# Altium PCB DC23.PcbDoc
Units mm, origin at the board's own origin, x right, y up, seen from the top; angles counter-clockwise.
Board outline 76 x 60 mm, 2 copper layers (Top Layer, Bottom Layer); 130 components, 69 nets, 345 pads, 412 vias.
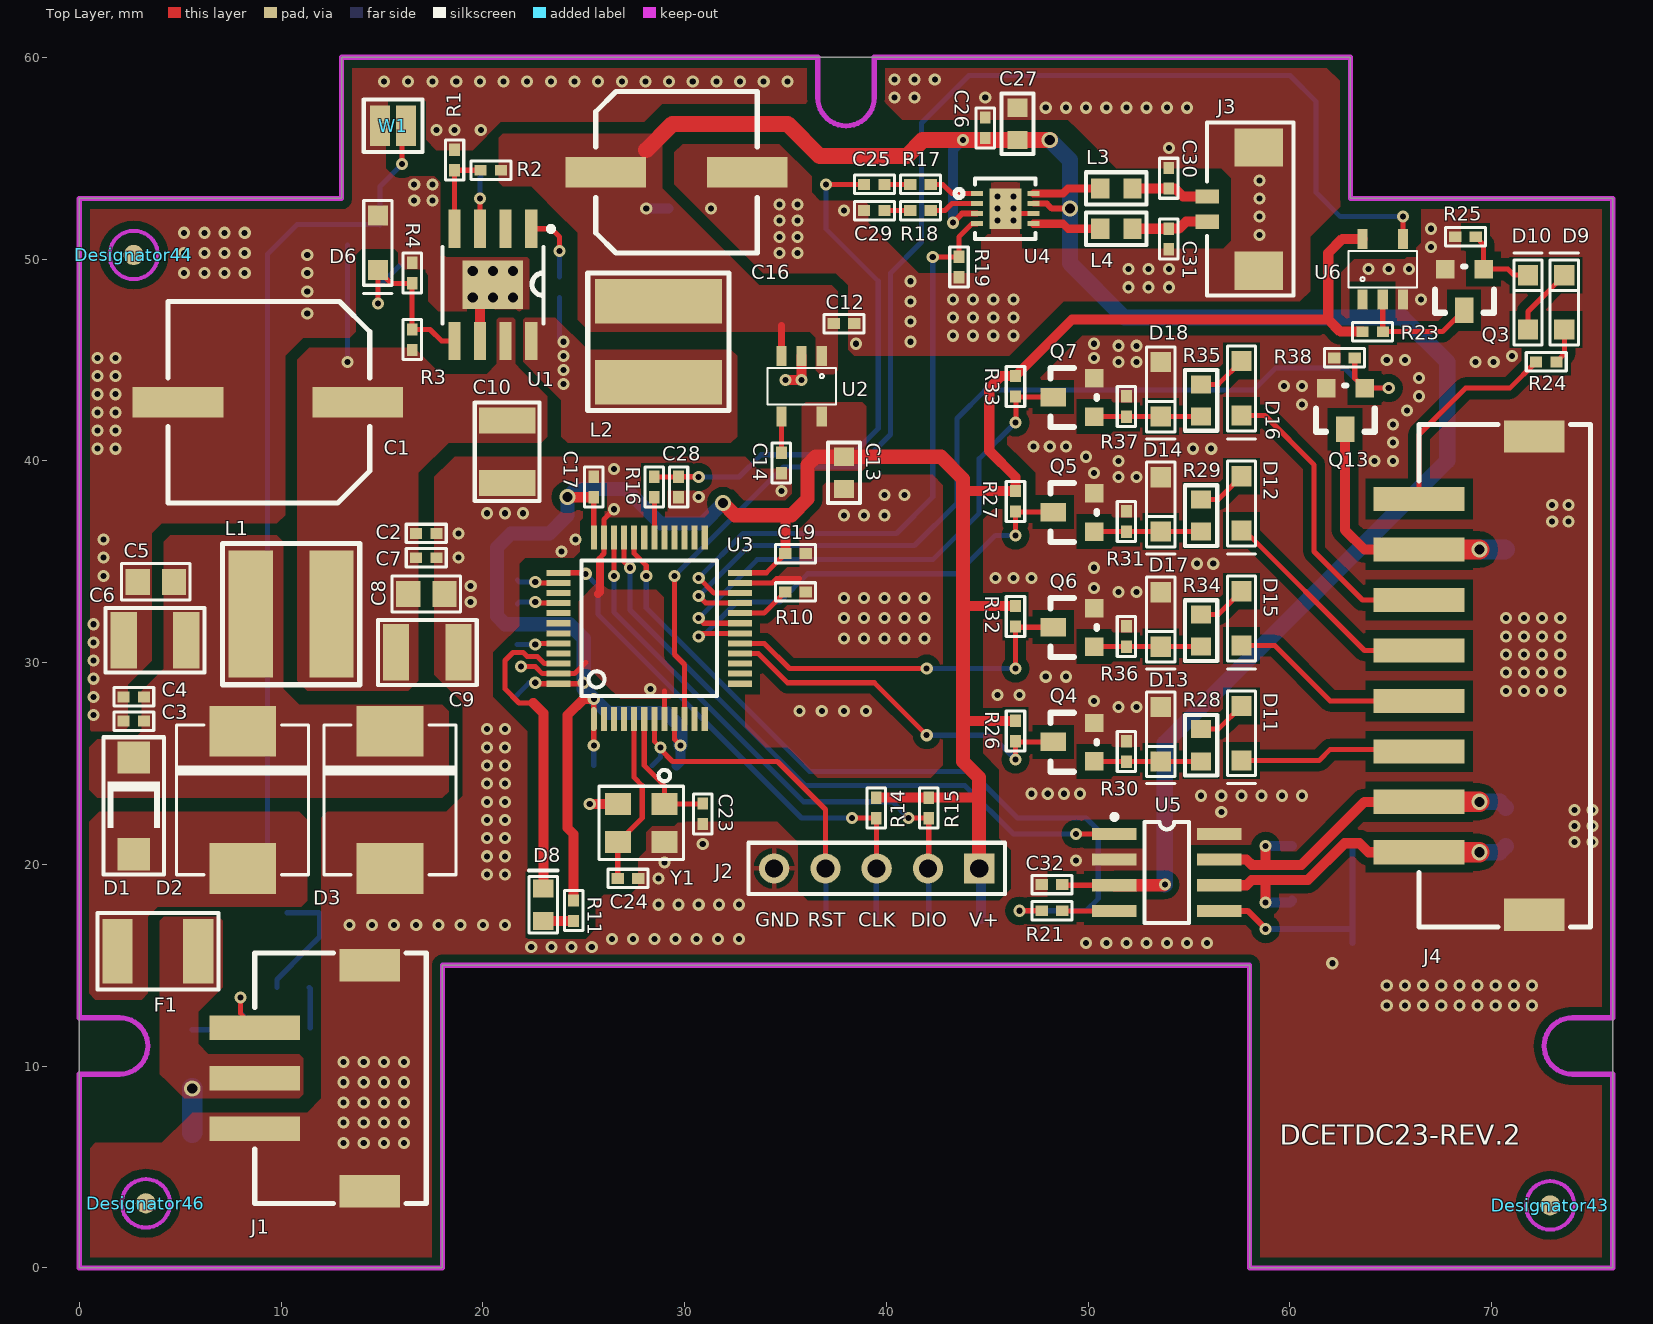
[diagram p0: Top Layer view]
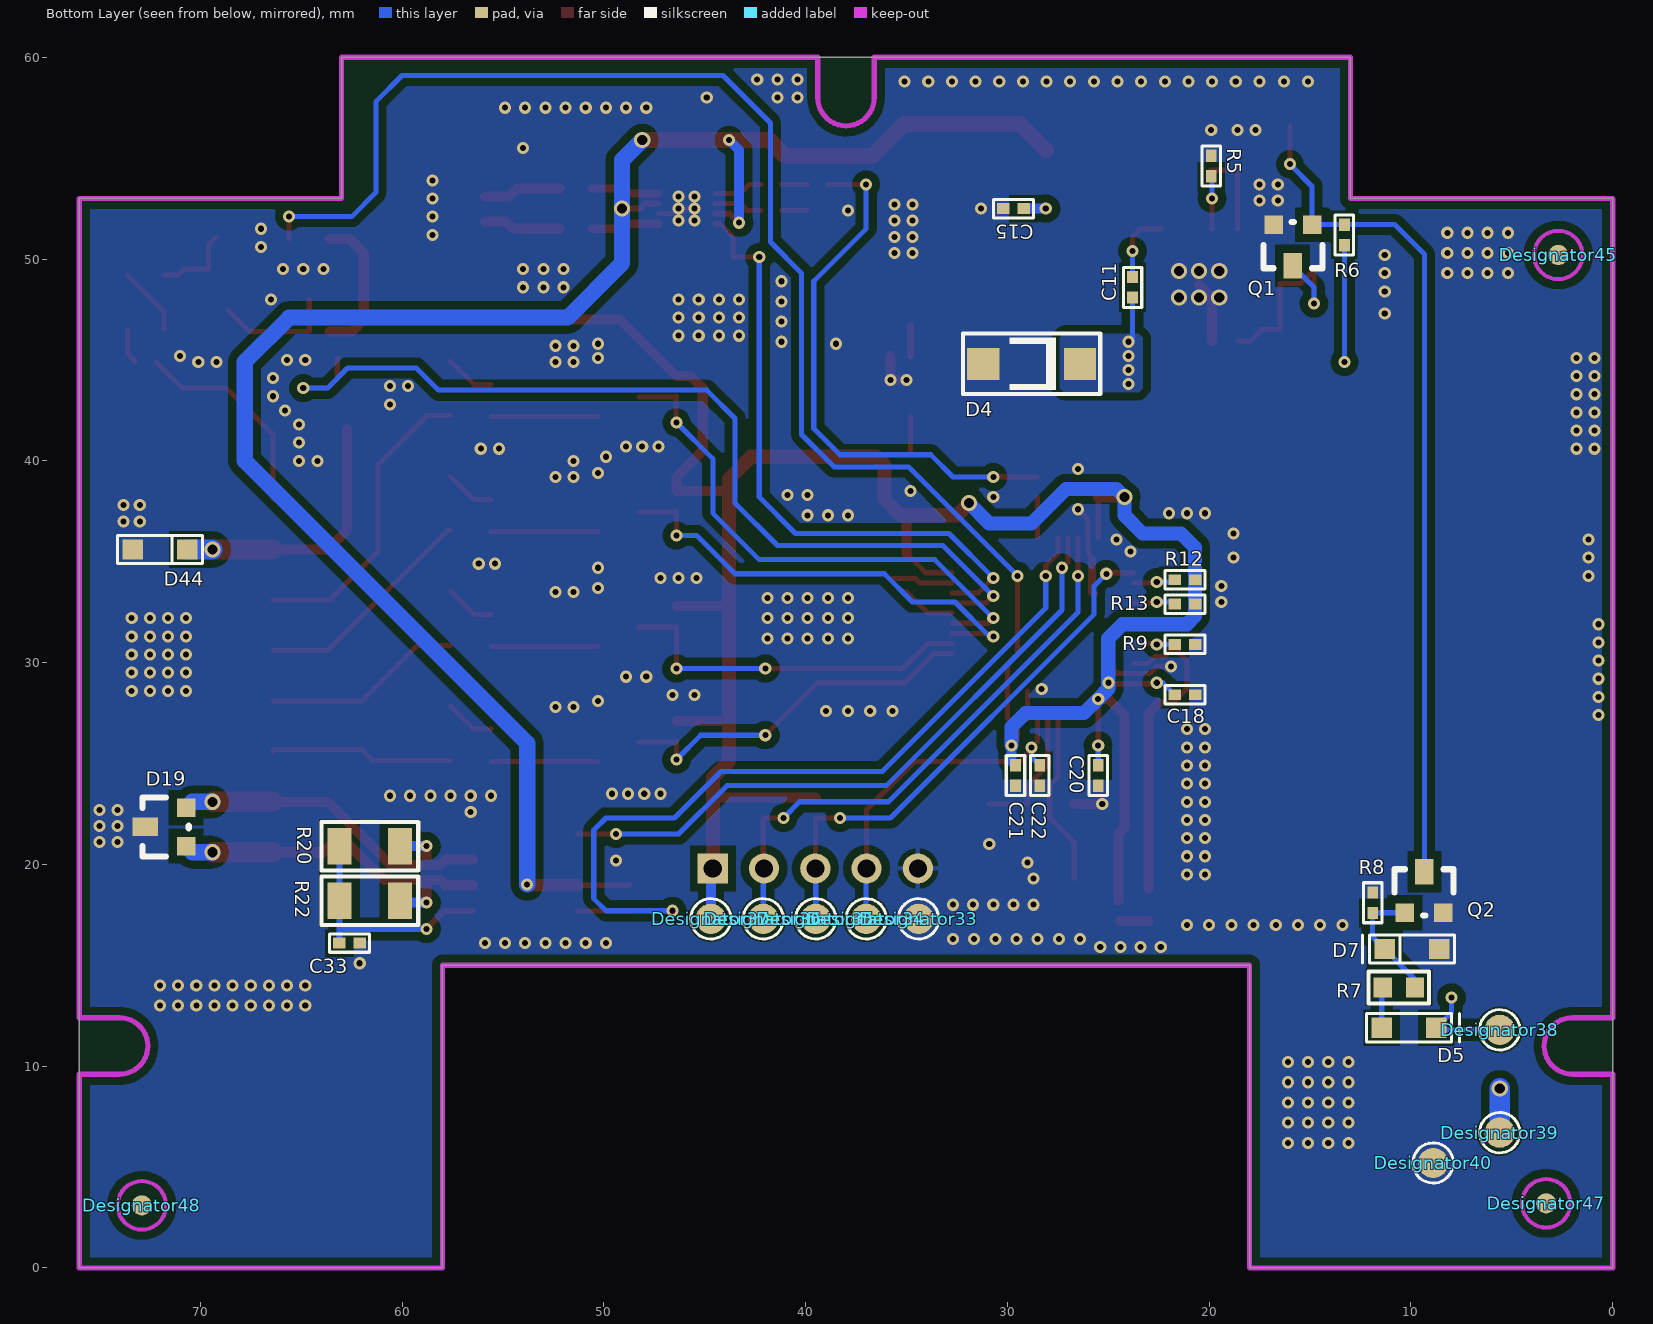
[diagram p1: Bottom Layer view, seen from below]

## Layer stack, top to bottom
Top Solder: solder mask 0.0102, Solder Resist, Dk 3.5
Top Layer: signal copper 0.0356
Dielectric 1: dielectric 0.32, FR-4, Dk 4.8
Bottom Layer: signal copper 0.0356
Bottom Solder: solder mask 0.0102, Solder Resist, Dk 3.5

## Board outline
0,0 0,53 13,53 13,60 63,60 63,53 76,53 76,0 58,0 58,15 18,15 18,0

## Design rules (kind name [scope] priority, off if disabled: settings)
Clearance Clearance_1 [InPolygon AND InNet('GND')] p1: gap=0.4
Clearance [All] p2: gap=0.127
ComponentClearance [All] p1: gap=0 collisioncheckmode=3 verticalgap=0 showdistances=FALSE
DiffPairsRouting [All] p1: maxlimit=0.254 minlimit=0.254 mostfreqgap=0.254 toplayer_minwidth=0.381 toplayer_maxwidth=1 toplayer_prefwidth=0.381 bottomlayer_minwidth=0.381 bottomlayer_maxwidth=1 bottomlayer_prefwidth=0.381 maxuncoupledlength=12.7
PolygonConnect PolygonConnect_1 [InComponent('J2')] p1: connectstyle=Relief reliefconductorwidth=0.254 reliefentries=4 polygonreliefangle="90 Angle" airgapwidth=0.254
PolygonConnect [All] p2: connectstyle=Direct reliefconductorwidth=0.254 reliefentries=4 polygonreliefangle="90 Angle" airgapwidth=0.254
RoutingVias [All] p1: holewidth=0.3 width=0.6 viastyle="Through Hole" minholewidth=0.3 minwidth=0.6 maxholewidth=0.711 maxwidth=1.27
SolderMaskExpansion [All] p1: expansion=0.102
Width [All] p1: maxlimit=4 minlimit=0.127 preferedwidth=0.254 minimp=50.000000 maximp=50.000000 favimp=50.000000
28 further rules are at their usual default settings.

## Classes and differential pairs
component class 4-IO: C32 C33 D9 D10 D11 D12 D13 D14 D15 D16 D17 D18 D19 D44 J4 Q3 Q4 Q5 Q6 Q7 Q13 R20 R21 R22 R23 R24 R25 R26 R27 R28 R29 R30 R31 R32 R33 R34 R35 R36 R37 R38 U5 U6
component class 3-AUDIO-AMP: C25 C26 C27 C28 C29 C30 C31 J3 L3 L4 R16 R17 R18 R19 U4
component class 2-MCU: C17 C18 C19 C20 C21 C22 C23 C24 D8 J2 R9 R10 R11 R12 R13 R14 R15 Y1
component class 1-POWER: C1 C2 C3 C4 C5 C6 C7 C8 C9 C10 C11 C12 C13 C14 C15 C16 D1 D2 D3 D4 D5 D6 D7 F1 J1 L1 L2 Q1 Q2 R1 R2 R3 R4 R5 R6 R7 R8 U1 U2 W1
differential pair CAN: +CAN_P -CAN_N

## Components (designator, comment, footprint, x,y, rotation, side; value= is the part's Value field where it differs from the comment)
C1 "220uF/50V" DL-10*10.5 9.4,42.9 r270 top
C2 "1000pF/50V" 0402 17.2,36.4 r180 top
C3 "1000pF/50V" 0402 2.7,27.1 r0 top
C4 "0.1uF/50V" 0402 2.7,28.3 r0 top
C5 "1uF/50V" 0805 4.7,34 r180 top
C6 "10uF/50V" 1210 5.3,31.1 r180 top
C7 "0.1uF/50V" 0402 17.2,35.2 r180 top
C8 "1uF/50V" 0805 16.3,33.4 r0 top
C9 "10uF/50V" 1210 15.7,30.5 r0 top
C10 "10uF/50V" 1210 21.2,42 r270 top
C11 "0.01uF/50V" 0402 23.8,48.6 r270 bottom
C12 "0.1uF/50V" 0402 37.9,46.8 r0 top
C13 "10uF/6.3V" 0603 37.9,39.4 r180 top
C14 "0.01uF/50V" 0402 34.8,39.9 r270 top
C15 "0.1uF/50V" 0402 29.7,52.5 r0 bottom
C16 "220uF/16V" DL-8*10.5 29.6,54.3 r90 top
C17 "0.1uF/50V" 0402 25.5,38.7 r90 top
C18 "0.1uF/50V" 0402 21.2,28.4 r180 bottom
C19 "0.1uF/50V" 0402 35.5,35.4 r0 top
C20 "0.1uF/50V" 0402 25.5,24.4 r270 bottom
C21 "0.1uF/50V" 0402 29.6,24.4 r270 bottom
C22 "0.1uF" 0402 28.4,24.4 r270 bottom
C23 "20pF/50V" 0402 30.9,22.5 r90 top
C24 "20pF/50V" 0402 27.2,19.3 r180 top
C25 "0.1uF/50V" 0402 39.4,53.7 r0 top
C26 "0.1uF/50V" 0402 44.9,56.5 r90 top
C27 "10uF/6.3V" 0603 46.5,56.7 r0 top
C28 "0.1uF/50V" 0402 29.7,38.7 r90 top
C29 "0.1uF/50V" 0402 39.4,52.4 r0 top
C30 "1000pF/50V" 0402 54,54 r90 top
C31 "1000pF/50V" 0402 54,51 r270 top
C32 "0.1uF/50V" 0402 48.2,19 r0 top
C33 "1000pF(DNP)" 0402 62.6,16.1 r0 bottom
D1 "B360A" B320A 2.7,20.5 r90 top
D2 "SMDJ33CA" SMC 8.1,19.8 r270 top
D3 "SMDJ36A" SMC 15.4,19.8 r270 top
D4 "B360A" B320A 31.2,44.8 r180 bottom
D5 "MM3Z6V2ST1G" SOD323F 10.1,11.9 r0 bottom
D6 "MM3Z5V1ST1G" SOD323F 14.8,50.8 r90 top
D7 "1N5819HW" 1N5819 11.3,15.8 r180 bottom
D8 "LED GREEN" LED0603 23,17.2 r180 top
D9 "1N5819HW" 1N5819 73.6,49.2 r270 top
D10 "1N5819HW" 1N5819 71.8,49.2 r270 top
D11 "MM3Z6V2ST1G" SOD323F 57.6,26.5 r90 top
D12 "MM3Z6V2ST1G" SOD323F 57.6,37.889 r90 top (schematic designator D11)
D13 "1N5819HW" 1N5819 53.6,25.1 r90 top
D14 "1N5819HW" 1N5819 53.6,36.489 r90 top (schematic designator D13)
D15 "MM3Z6V2ST1G" SOD323F 57.6,32.189 r90 top (schematic designator D11)
D16 "MM3Z6V2ST1G" SOD323F 57.6,43.589 r90 top (schematic designator D11)
D17 "1N5819HW" 1N5819 53.6,30.789 r90 top (schematic designator D13)
D18 "1N5819HW" 1N5819 53.6,42.189 r90 top (schematic designator D13)
D19 "PESD1CAN" PESD2CAN 70.7,20.9 r90 bottom
D44 "PESD36VS1UJ" SOD323 72,35.6 r180 bottom
Designator33 "Comment" TP 34.4,17.3 r180 bottom
Designator34 "Comment" TP 37,17.3 r180 bottom
Designator35 "Comment" TP 39.5,17.3 r180 bottom
Designator36 "Comment" TP 42.1,17.3 r180 bottom
Designator37 "Comment" TP 44.7,17.3 r180 bottom
Designator38 "Comment" TP 5.6,11.8 r180 bottom
Designator39 "Comment" TP 5.6,6.7 r180 bottom
Designator40 "Comment" TP 8.9,5.2 r180 bottom
Designator43 "Comment" MARK 72.9,3.1 r0 top locked
Designator44 "Comment" MARK 2.7,50.2 r0 top locked
Designator45 "Comment" MARK 2.7,50.2 r180 bottom locked
Designator46 "Comment" MARK 3.3,3.2 r0 top locked
Designator47 "Comment" MARK 3.3,3.2 r180 bottom locked
Designator48 "Comment" MARK 72.9,3.1 r180 bottom locked
F1 "1.1A/33V" 1812 1.9,15.7 r0 top
J1 "POWER" XH2.54-SMT-V-3P 8.7,6.9 r90 top
J2 "SWD" HDR1X5 44.6,19.8 r180 top
J3 "SPEAKER" 1250WV-S-2P 55.9,53.1 r90 top
J4 "I/O" XH2.54-SMT-V-8P 66.4,20.6 r90 top
L1 "8.2uH/1.6A" IND-SMD-5.8*5.8 10.5,32.4 r90 top
L2 "8.2uH/1.6A" IND-SMD-5.8*5.8 28.7,45.9 r180 top
L3 "120ohm/100MHz 2A" 0603 51.4,53.5 r90 top
L4 "120ohm/100MHz 2A" 0603 51.4,51.5 r90 top
Q1 "S9014" NPN 14.9,51.7 r0 bottom
Q2 "S9014" NPN 10.3,17.6 r180 bottom
Q3 "S9014" NPN 69.6,49.5 r180 top
Q4 "S9014" NPN 50.3,25.1 r90 top
Q5 "S9014" NPN 50.3,36.489 r90 top (schematic designator Q4)
Q6 "S9014" NPN 50.3,30.789 r90 top (schematic designator Q4)
Q7 "S9014" NPN 50.3,42.189 r90 top (schematic designator Q4)
Q13 "BSS138P" NPN 63.7,43.6 r180 top
R1 "1.1K/1%" 0402 18.6,54.911 r270 top
R2 "3.16K/1%" 0402 20.4,54.4 r180 top
R3 "80.2K/1%" 0402 16.5,46 r90 top
R4 "20K/1%" 0402 16.5,49.3 r90 top
R5 "DNP" 0402 19.9,54.6 r90 bottom
R6 "47K" 0402 13.3,51.2 r270 bottom
R7 "15K" 0603 10.6,13.9 r270 bottom
R8 "47K" 0402 11.9,18.1 r270 bottom
R9 "0" 0402 21.2,30.9 r180 bottom
R10 "0" 0402 35.5,33.5 r180 top
R11 "330" 0402 24.5,17.7 r90 top
R12 "10K" 0402 21.2,34.1 r0 bottom
R13 "10K" 0402 21.2,32.9 r0 bottom
R14 "10K" 0402 39.5,22.8 r270 top
R15 "10K" 0402 42.1,22.8 r270 top
R16 "2K" 0402 28.5,38.7 r270 top
R17 "30K" 0402 41.7,53.7 r180 top
R18 "30K" 0402 41.7,52.4 r180 top
R19 "10K" 0402 43.6,49.6 r90 top
R20 "62/(1/4W)(DNP)" 1206 60.1,20.9 r0 bottom
R21 "1K" 0402 48.2,17.7 r0 top
R22 "62(1/4W)(DNP)" 1206 63.1,18.2 r180 bottom
R23 "47K" 0402 64.1,46.4 r0 top
R24 "10K" 0402 72.7,44.9 r0 top
R25 "47K" 0402 68.7,51.1 r180 top
R26 "47K" 0402 46.4,26.6 r90 top
R27 "47K" 0402 46.4,37.989 r90 top (schematic designator R26)
R28 "15K" 0603 55.6,25.9 r180 top
R29 "15K" 0603 55.6,37.289 r180 top (schematic designator R28)
R30 "47K" 0402 51.9,25.6 r270 top
R31 "47K" 0402 51.9,36.989 r270 top (schematic designator R30)
R32 "47K" 0402 46.4,32.289 r90 top (schematic designator R26)
R33 "47K" 0402 46.4,43.689 r90 top (schematic designator R26)
R34 "15K" 0603 55.6,31.589 r180 top (schematic designator R28)
R35 "15K" 0603 55.6,42.989 r180 top (schematic designator R28)
R36 "47K" 0402 51.9,31.289 r270 top (schematic designator R30)
R37 "47K" 0402 51.9,42.689 r270 top (schematic designator R30)
R38 "10K" 0402 62.7,45.1 r0 top
U1 "LM22676MR-ADJ" PSO8 22.4,51.5 r180 top
U2 "SPX3819M5-3.3" SOT23-5 36.8,45.2 r180 top
U3 "STM32F103CBT6" LQFP48 25.5,27.2 r90 top
U4 "LM4673SD" WSON8 45.9,52.5 r270 top
U5 "TJA1040T" SO8 53.9,19.6 r270 top
U6 "SN74LVC1G14DBV" SOT23-5 63.6,48 r0 top
W1 "Jumper" SHORTCUT 14.9,56.6 r0 top
Y1 "8MHz" XTAL4_SX_3225 29,23 r180 top

## Footprints (in the part's own frame and the unit in brackets; to place one, negate y for a bottom-side part, rotate by r counter-clockwise, add the part's x,y. Pads: shape width x height; smd on the part's side, far side on the other; paste and mask are expansions set on the pad)
1N5819 [mm]
  rect 1x1 smd: 1(2.7,0) 2(0,0)
  silkscreen extent -1.1,-0.7 3.45,0.7
0402 [mil] "Chip Capacitor, Body 1.0x0.5mm, IPC High Density"
  rect 24x21 smd: 1(20.13,0) 2(-19.87,0)
  silkscreen extent -39,-18 39,18
0603 [mm]
  rect 1x0.9 smd: 1(0,0.8) 2(0,-0.8)
  silkscreen extent -0.8,-1.5 0.8,1.5
0805 [mm]
  rect 1.2x1.3 smd: 1(0,0) 2(1.8,0)
  silkscreen extent -0.8,-0.9 2.6,0.9
1206 [mm]
  rect 1.2x1.8 smd: 1(0,0) 2(3,0)
  silkscreen extent -0.9,-1.2 3.9,1.2
1210 [mm]
  rect 1.3x2.8 smd: 1(0,0) 2(3.1,0)
  silkscreen extent -0.9,-1.6 4,1.6
1250WV-S-2P [mm]
  rect 0.7x1.18 smd: 1(0,0) 2(-1.25,0)
  rect 1.9x2.4 smd: ""(-3.675,-2.56) ""(2.425,-2.56)
  silkscreen extent -4.9,-4.28 3.67,0
1812 [mm]
  rect 1.5x3.2 smd: 1(0,0) 2(4,0)
  silkscreen extent -1,-1.9 5,1.9
B320A [mm]
  rect 1.6x1.6 smd: 1(0,0) 2(4.8,0)
  silkscreen extent -1,-1.5 5.8,1.5
DL-8*10.5 [mm]
  rect 1.5x4 smd: 1(0,3.5) 2(0,-3.5)
  silkscreen extent -4,-4 4,4
DL-10*10.5 [mm]
  rect 1.5x4.5 smd: 1(0,4.4) 2(0,-4.5)
  silkscreen extent -5,-5 5,5
HDR1X5 [mm] "Connector; Header; 5 Position"
  rect 1.5x1.5 hole 0.9: 1(0,0)
  round 1.5 hole 0.9: 2(2.54,0) 3(5.08,0) 4(7.62,0) 5(10.16,0)
  silkscreen extent -1.27,-1.27 11.43,1.27
IND-SMD-5.8*5.8 [mm]
  rect 6.3x2.2 smd: 1(0,2) 2(0,-2)
  silkscreen extent -3.5,-3.4 3.5,3.4
LED0603 [mm]
  rect 1x0.9 smd: 1(0,0) 2(0,-1.6)
  silkscreen extent -0.7,-2.5 0.7,0.6
LQFP48 [mm]
  oval 1.2x0.3 smd: 1(0,0)
  rect 1.2x0.3 smd: 2(0,-0.5) 3(0,-1) 4(0,-1.5) 5(0,-2) 6(0,-2.5) 7(0,-3) 8(0,-3.5) 9(0,-4) 10(0,-4.5) 11(0,-5) 12(0,-5.5) 25(9,-5.5) 26(9,-5) 27(9,-4.5) 28(9,-4) 29(9,-3.5) 30(9,-3) 31(9,-2.5) 32(9,-2) 33(9,-1.5) 34(9,-1) 35(9,-0.5) 36(9,0)
  rect 0.3x1.2 smd: 13(1.75,-7.25) 14(2.25,-7.25) 15(2.75,-7.25) 16(3.25,-7.25) 17(3.75,-7.25) 18(4.25,-7.25) 19(4.75,-7.25) 20(5.25,-7.25) 21(5.75,-7.25) 22(6.25,-7.25) 23(6.75,-7.25) 24(7.25,-7.25) 37(7.25,1.75) 38(6.75,1.75) 39(6.25,1.75) 40(5.75,1.75) 41(5.25,1.75) 42(4.75,1.75) 43(4.25,1.75) 44(3.75,1.75) 45(3.25,1.75) 46(2.75,1.75) 47(2.25,1.75) 48(1.75,1.75)
  silkscreen extent 1.13,-6.11 7.86,0.62
MARK [mm]
  round 1 smd paste-0.5 mask+0.6: ""(0,0)
  Keep-Out Layer circle w0.2: c0,0 r1.2
NPN [mil]
  rect 36x50 smd: 1(38,80)
  rect 36x36 smd: 2(0,0) 3(75,0)
  silkscreen extent -20,-5 95,85
PESD2CAN [mil]
  rect 36x36 smd: 1(0,0) 2(75,0)
  rect 36x50 smd: 3(38,80)
  silkscreen extent -20,-5 95,85
PSO8 [mm]
  rect 0.6x1.9 smd: 1(0,0) 2(1.27,0) 3(2.54,0) 4(3.81,0) 5(3.81,5.56) 6(2.54,5.56) 7(1.27,5.56) 8(0,5.56)
  rect 3x2.4 smd: 9(1.9,2.78)
  silkscreen extent -1.1,-0.11 4.4,4.7
SHORTCUT [mm]
  rect 1x2 smd paste-0.5: 1(0,0) 2(1.3,0)
  silkscreen extent -0.8,-1.3 2.1,1.3
SMC [mil]
  rect 99x130 smd: 1(0,0) 2(-267.72,0)
  silkscreen extent -280,-129 12,129
SO8 [mm] "Small Outline; 8 Leads; Body Width 3.9 mm; Pitch 1.27 mm"
  rect 0.6x2.2 smd: 1(-1.905,-2.6) 2(-0.635,-2.6) 3(0.635,-2.6) 4(1.905,-2.6) 5(1.905,2.6) 6(0.635,2.6) 7(-0.635,2.6) 8(-1.905,2.6)
  silkscreen extent -2.88,-2.72 2.5,1.1
SOD323 [mm]
  rect 1x1 smd: 1(-1.35,0) 2(1.35,0)
  silkscreen extent -2.1,-0.7 2.1,0.7
SOD323F [mm]
  rect 1x1 smd: 1(-1.35,0) 2(1.35,0)
  silkscreen extent -2.5,-0.7 2.1,0.7
SOT23-5 [mm]
  rect 0.5x1 smd: 1(0,0) 2(1,0) 3(2,0) 4(2,3) 5(0,3)
  silkscreen extent -0.7,0.6 2.7,2.4
TP [mm]
  round 1.5 smd paste-1.5: ""(0,0)
  silkscreen extent -1,-1 1,1
WSON8 [mm]
  rect 0.25x0.6 smd: 1(-0.75,-1.4) 2(-0.25,-1.4) 3(0.25,-1.4) 4(0.75,-1.4) 5(0.75,1.4) 6(0.25,1.4) 7(-0.25,1.4) 8(-0.75,1.4)
  rect 2x1.6 smd: ""(0,0)
  silkscreen extent -1.5,-2.5 1.5,1.5
XH2.54-SMT-V-3P [mm]
  rect 1.2x4.5 smd: 1(0,0) 2(2.5,0) 3(5,0)
  rect 1.6x3 smd: ""(-3.1,-5.7) ""(8.1,-5.7)
  silkscreen extent -3.7,-8.5 8.7,0
XH2.54-SMT-V-8P [mm]
  rect 1.2x4.5 smd: 1(0,0) 2(2.5,0) 3(5,0) 4(7.5,0) 5(10,0) 6(12.5,0) 7(15,0) 8(17.5,0)
  rect 1.6x3 smd: ""(-3.1,-5.7) ""(20.6,-5.7)
  silkscreen extent -3.7,-8.5 21.2,0
XTAL4_SX_3225 [mil]
  rect 51x43 smd: 1(0,0) 2(90.56,0) 3(90.56,74.8) 4(0,74.8)
  silkscreen extent -37,-66 128,109

## Part data
C1 C16: library part "CAP WP"
C2 C3 C4 C5 C6 C7 C8 C9 C10 C11 C12 C13 C14 C15 C17 C18 C19 C20 C21 C22 C23 C24 C25 C26 C27 C28 C29 C30 C31: library part Cap, "Capacitor"
C32 C33: library part "P_CAP NP"
D1 D3 D4 D7 D9 D10 D13 D14 D17 D18 D44: library part "Diode 11DQ03", "Schottky Rectifier"
D2: library part TVS-BI
D5 D6 D11 D12 D15 D16: library part MMGZ5231BPTLL34
D8: library part LN01401_1
D19: library part PESD2CAN
F1: library part 2A_32VDC_0467-002
J1: library part "Header 3", "Header, 3-Pin"
J2: library part "Header 5", "Header, 5-Pin"
J3: library part "Header 2", "Header, 2-Pin"
J4: library part "Header 8", "Header, 8-Pin"
L1 L2: library part 4.7UH_CDH2D09BNP-4R7MC_0.7A_20%
L3 L4: library part Inductor, "Inductor"
Q1 Q2 Q3 Q4 Q5 Q6 Q7: library part MMBT3904_NL_SOT23-3
Q13: library part MOSFET-N, "N-Channel MOSFET"
R1 R2 R3 R4 R5 R6 R9 R10 R12 R13 R14 R15 R16 R17 R18 R19 R26 R27 R32 R33: library part Res3, "Resistor"
R7 R8 R28 R29 R30 R31 R34 R35 R36 R37 R38: library part R
R11: library part CR16-1003FM
R20 R21 R22 R23 R24 R25: library part P_R
U1: library part LM22670_0
U2: library part TPS73633DBVT
U3: library part STM32F103CX-LQFP48
U5: library part TJA1040T_SO_8P, "IC XCVR CAN HS 5V SO8"
U6: library part 74LVC1G04GW_SOT353-5
W1: "Jumper Wire"
Y1: library part XTAL_13Y_A, "XTAL 24MHZ -- 3.2X2.5MM SMT"

## Via types
v1: diameter 0.6, hole 0.3, Top Layer to Bottom Layer, tented both sides, 398 vias
v2: diameter 0.8, hole 0.5, Top Layer to Bottom Layer, tented both sides, 14 vias

## Nets (pads, with @x,y where several pads share a name; then routed paths per layer and width w, separated by ;. In a path a pad name is that pad's centre, name@x,y a point inside that pad or via, vN(x,y) a via of type N, cw(c..) or ccw(c..) an arc to the next point about the centre after c; other vN are vias at no path point)
ACC: D5.1 Designator38. J1.3 | length 6.8
  Top Layer w0.254: v1(8,13.4) 8,12.6 J1.3
  Bottom Layer w0.254: Designator38. 8.65,11.8 D5.1 8,12.65 v1(8,13.4)
AMP-SHDN: R19.1 U3.22 U4.4 | length 31
  Top Layer w0.254: v1(30.7,34.2) 31.45,33.45 U3.22 ; v1(42.3,50.1) 43.589,50.1 R19.1 43.6,51.1 44.25,51.75 U4.4
  Bottom Layer w0.254: v1(30.7,34.2) 32.9,36.4 40.5,36.4 42.3,38.2 v1(42.3,50.1)
CAN_N: D19.1 J4.1 R22.2 U5.6 | length 17.8
  Top Layer w0.5: U5.6 57.85,18.965 58.108,19.223 58.8,19.223 ; v1(58.8,18.1) 58.8,19.223 ; J4.1 63.9,20.6 63.454,21.046 62.712,21.046 60.889,19.223 58.8,19.223
  Top Layer w1: J4.1 v2(69.4,20.6)
  Bottom Layer w0.5: v1(58.8,18.1) 60,18.1 R22.2
  Bottom Layer w0.8: v2(69.4,20.6) 70.4,20.6 D19.1
CAN_P: D19.2 J4.2 R20.1 U5.7 | length 17.9
  Top Layer w0.5: U5.7 57.85,20.235 58.108,19.977 58.8,19.977 ; v1(58.8,20.9) 58.8,19.977 ; J4.2 63.7,23.1 60.577,19.977 58.8,19.977
  Top Layer w1: J4.2 v2(69.4,23.1)
  Bottom Layer w0.5: v1(58.8,20.9) R20.1
  Bottom Layer w0.8: v2(69.4,23.1) 70.405,23.1 D19.2
CANRX: R21.2 U3.32 | length 39.3
  Top Layer w0.254: U3.32 27.5,35.4 28.1,34.8 v1(28.1,34.3) ; v1(46.6,17.7) R21.2
  Bottom Layer w0.254: v1(28.1,34.3) 28.1,32.7 36.2,24.6 44.2,24.6 46.5,22.3 49.9,22.3 50.5,21.7 50.5,18.3 49.9,17.7 v1(46.6,17.7)
CANTX: U3.33 U5.1 | length 32.3
  Top Layer w0.254: U3.33 27,35 v1(27.3,34.7) ; v1(49.4,21.5) 51.295,21.5 U5.1
  Bottom Layer w0.254: v1(27.3,34.7) 27.3,32.6 36,23.9 43.9,23.9 46.3,21.5 v1(49.4,21.5)
GND: C1.2 C2.2 C3.2 C4.2 C5.2 C6.2 C7.2 C8.2 C9.2 C10.2 C12.1 C13.1 C14.1 C15.1 C16.2 C17.1 C18.1 C19.1 C20.1 C21.1 C22.1 C23.2 C24.2 C26.1 C27.1 C28.2 C29.2 C30.1 C31.1 C32.2 C33.2 D3.1 D4.1 D6.2 D7.1 D13.1 D14.1 D17.1 D18.1 D19.3 D44.1 Designator33. Designator40. J1. J1.1 J2.5 J3. J4. Q1.3 Q2.3 Q3.3 Q4.3 Q5.3 Q6.3 Q7.3 Q13.3 R1.2 R4.1 R5.1 R8.2 R9.1 R10.2 R19.2 R25.1 R30.2 R31.2 R36.2 R37.2 R38.2 U1.6 U1.9 U2.2 U3.8 U3.23 U3.35 U3.47 U4. U4.6 U5.2 U5.8 U6.3 W1.1 Y1.2 Y1.4 | length 20.5
  Top Layer w0.254: v1(21.9,29.8) 22.6,29.8 22.95,29.45 U3.47 24.55,29.45 25.1,30 ; 25.8,35.1 25.8,35.2 26,35.4 U3.35 26,37.1 v1(26.5,37.6) ; U3.8 29,28.6 ; U3.23 34.35,33.95 34.567,34.167 35.694,34.167 ; U4. 46.15,52.25 U4.6
  Top Layer w0.4: 25.7,33.4 25.8,33.5 25.8,35.1
  Top Layer w0.5: U1.6 19.86,48.08 U1.9 ; v1(25.3,23) Y1.2 ; v1(35,44) v1(35.8,44) U2.2
  other v1: 13.1,6.2 14.1,6.2 15.1,6.2 16.1,6.2 13.1,7.2 14.1,7.2 15.1,7.2 16.1,7.2 13.1,8.2 14.1,8.2 15.1,8.2 16.1,8.2 13.1,9.2 14.1,9.2 15.1,9.2 16.1,9.2 13.1,10.2 14.1,10.2 15.1,10.2 16.1,10.2 64.8,13 65.7,13 66.6,13 67.5,13 68.4,13 69.3,13 70.2,13 71.1,13 72,13 64.8,14 65.7,14 66.6,14 67.5,14 68.4,14 69.3,14 70.2,14 71.1,14 72,14 62.1,15.1 22.4,15.9 23.4,15.9 24.4,15.9 25.4,15.9 49.9,16.1 50.9,16.1 51.9,16.1 52.9,16.1 53.9,16.1 54.9,16.1 55.9,16.1 26.4,16.3 27.45,16.3 28.5,16.3 29.55,16.3 30.6,16.3 31.65,16.3 32.7,16.3 13.4,17 14.5,17 15.6,17 16.7,17 17.8,17 18.9,17 20,17 21.1,17 28.7,18 29.7,18 30.7,18 31.7,18 32.7,18 28.7,19.3 20.2,19.5 21.1,19.5 29,20.1 49.4,20.2 20.2,20.4 21.1,20.4 30.9,21 74.1,21.1 75,21.1 20.2,21.3 21.1,21.3 74.1,21.9 75,21.9 20.2,22.2 21.1,22.2 56.6,22.6 74.1,22.7 75,22.7 20.2,23.1 21.1,23.1 55.6,23.4 56.6,23.4 57.6,23.4 58.6,23.4 59.6,23.4 60.6,23.4 47.2,23.5 48,23.5 48.8,23.5 49.6,23.5 20.2,24 21.1,24 20.2,24.9 21.1,24.9 20.2,25.8 21.1,25.8 20.2,26.7 21.1,26.7 0.7,27.4 35.7,27.6 36.8,27.6 37.9,27.6 39,27.6 51.5,27.8 52.4,27.8 50.3,28.1 0.7,28.3 45.5,28.4 46.6,28.4 70.7,28.6 71.6,28.6 72.5,28.6 73.4,28.6 28.3,28.7 0.7,29.2 47.9,29.3 48.9,29.3 70.7,29.5 71.6,29.5 72.5,29.5 73.4,29.5 0.7,30.1 70.7,30.4 71.6,30.4 72.5,30.4 73.4,30.4 0.7,31 37.9,31.2 38.9,31.2 39.9,31.2 40.9,31.2 41.9,31.2 70.7,31.3 71.6,31.3 72.5,31.3 73.4,31.3 0.7,31.9 37.9,32.2 38.9,32.2 39.9,32.2 40.9,32.2 41.9,32.2 70.7,32.2 71.6,32.2 72.5,32.2 73.4,32.2 19.4,33 37.9,33.2 38.9,33.2 39.9,33.2 40.9,33.2 41.9,33.2 51.5,33.5 52.4,33.5 50.3,33.7 19.4,33.8 45.4,34.2 46.3,34.2 47.2,34.2 1.2,34.3 50.3,34.7 55.4,34.9 56.2,34.9 1.2,35.2 18.8,35.2 23.9,35.5 1.2,36.1 24.6,36.1 18.8,36.4 73,37 73.8,37 37.9,37.3 38.9,37.3 39.9,37.3 20.2,37.4 21.1,37.4 22,37.4 73,37.8 73.8,37.8 30.7,38.2 39.9,38.3 40.9,38.3 34.8,38.5 51.5,39.2 52.4,39.2 50.3,39.4 26.5,39.6 51.5,40 64.2,40 65.1,40 49.9,40.2 0.9,40.6 1.8,40.6 55.2,40.6 56.1,40.6 47.3,40.7 48.1,40.7 48.9,40.7 65.1,40.9 0.9,41.5 1.8,41.5 65.1,41.8 0.9,42.4 1.8,42.4 65.8,42.5 60.6,42.8 66.4,43.2 0.9,43.3 1.8,43.3 59.7,43.7 60.6,43.7 66.4,44.1 0.9,44.2 1.8,44.2 51.5,44.9 52.4,44.9 69.2,44.9 70.1,44.9 64.8,45 65.7,45 0.9,45.1 1.8,45.1 50.3,45.1 71,45.2 51.5,45.7 52.4,45.7 38.5,45.8 50.3,45.8 41.2,45.9 43.3,46.2 44.3,46.2 45.3,46.2 46.3,46.2 41.2,46.9 43.3,47.1 44.3,47.1 45.3,47.1 46.3,47.1 11.3,47.3 41.2,47.9 43.3,48 44.3,48 45.3,48 46.3,48 66.5,48 11.3,48.4 52,48.6 53,48.6 54,48.6 41.2,48.9 5.2,49.3 6.2,49.3 7.2,49.3 8.2,49.3 11.3,49.3 52,49.5 53,49.5 54,49.5 63.9,49.5 64.9,49.5 65.9,49.5 11.3,50.2 5.2,50.3 6.2,50.3 7.2,50.3 8.2,50.3 34.7,50.3 35.6,50.3 67,50.6 34.7,51.1 35.6,51.1 58.5,51.2 5.2,51.3 6.2,51.3 7.2,51.3 8.2,51.3 67,51.5 34.7,51.9 35.6,51.9 45.5,51.9 46.3,51.9 58.5,52.1 37.9,52.4 31.3,52.5 45.5,52.5 46.3,52.5 34.7,52.7 35.6,52.7 16.6,52.9 17.5,52.9 58.5,53 45.5,53.1 46.3,53.1 16.6,53.7 17.5,53.7 58.5,53.9 54,55.5 17.7,56.4 18.6,56.4 19.9,56.4 47.9,57.5 48.9,57.5 49.9,57.5 50.9,57.5 51.9,57.5 52.9,57.5 53.9,57.5 54.9,57.5 40.4,58 41.4,58 44.9,58 15.1,58.8 16.3,58.8 17.5,58.8 18.683,58.8 19.856,58.8 21.028,58.8 22.2,58.8 23.372,58.8 24.544,58.8 25.717,58.8 26.889,58.8 28.061,58.8 29.233,58.8 30.406,58.8 31.578,58.8 32.75,58.8 33.922,58.8 35.094,58.8 40.4,58.9 41.4,58.9 42.4,58.9
  other v2: 19.5,48.1 20.5,48.1 21.5,48.1 19.5,49.4 20.5,49.4 21.5,49.4
IN1: Q4.1 R26.2 U3.16 | length 18.6
  Top Layer w0.254: U3.16 33.65,30.45 35.1,29 39.4,29 v1(42,26.4) ; v1(46.4,25.2) R26.2 46.43,26.065 Q4.1
  Bottom Layer w0.254: v1(42,26.4) 45.2,26.4 v1(46.4,25.2)
IN2: Q6.1 R32.2 U3.17 | length 18.1
  Top Layer w0.254: U3.17 33.95,30.95 35.2,29.7 v1(42,29.7) ; v1(46.4,29.7) R32.2 46.43,31.754 Q6.1
  Bottom Layer w0.254: v1(42,29.7) v1(46.4,29.7)
IN3: Q5.1 R27.2 U3.18 | length 22.9
  Top Layer w0.254: v1(30.7,31.3) 30.85,31.45 U3.18 ; v1(46.4,36.3) R27.2 46.43,37.454 Q5.1
  Bottom Layer w0.254: v1(30.7,31.3) 30.9,31.3 32.6,33 34.7,33 36.1,34.4 43.5,34.4 45.4,36.3 v1(46.4,36.3)
IN4: Q7.1 R33.2 U3.19 | length 26.6
  Top Layer w0.254: v1(30.7,32.2) 30.95,31.95 U3.19 ; v1(46.4,41.9) 46.43,41.93 R33.2@46.43,43.154 ; R33.2 R33.2@46.43,43.154 ; Q7.1 R33.2@46.43,43.154
  Bottom Layer w0.254: v1(30.7,32.2) 33.6,35.1 42.3,35.1 44.6,37.4 44.6,40.1 v1(46.4,41.9)
INPUT1: D11.1 J4.3 | length 9.1
  Top Layer w0.254: D11.1 61.45,25.15 62,25.7 66.3,25.7 J4.3
INPUT2: D15.1 J4.4 | length 9.9
  Top Layer w0.254: D15.1 59.261,30.839 62,28.1 J4.4
INPUT3: D12.1 J4.5 | length 11.3
  Top Layer w0.254: D12.1 57.761,36.539 63.7,30.6 J4.5
INPUT4: D16.1 J4.6 | length 15.1
  Top Layer w0.254: D16.1 58.761,42.239 61.2,39.8 61.2,35.5 63.6,33.1 J4.6
LED: D8.2 U3.46 | length 15.5
  Top Layer w0.254: 22.5,28 21.8,28 21.1,28.7 21.1,30.1 21.5,30.5 22,30.5 22.2,30.3 22.7,30.3 23.05,29.95 U3.46
  Top Layer w0.5: 22.5,28 23,27.5 D8.2
NetC11_1: C11.1 D4.2 L2.1 U1.8 | length 2.1
  Bottom Layer w0.254: v1@23.8,46 C11.1
  other v1: 24,43.8 24,44.5 24,45.2 24,45.9
NetC11_2: C11.2 U1.1 | length 3.6
  Top Layer w0.254: U1.1 23.4,51.5 23.8,51.1 v1(23.8,50.4)
  Bottom Layer w0.254: C11.2 v1(23.8,50.4)
NetC14_2: C14.2 U2.4 | length 1.8
  Top Layer w0.254: C14.2 U2.4
NetC25_1: C25.1 R17.1 | length 1.3
  Top Layer w0.254: C25.1 R17.1
NetC25_2: C25.2 C28.1 R16.2 | length 27.2
  Top Layer w0.254: R16.2 29.694,39.205 C28.1 30.689,39.211 v1(30.7,39.2) ; v1(37,53.7) 37.5,53.7 C25.2
  Bottom Layer w0.254: v1(30.7,39.2) 32.7,39.2 33.8,40.3 38.3,40.3 39.6,41.6 39.6,48.9 37,51.5 v1(37,53.7)
NetC29_1: C29.1 R18.1 | length 1.3
  Top Layer w0.254: C29.1 R18.1
NetC30_2: C30.2 J3.1 L3.2 | length 3.9
  Top Layer w0.5: L3.2 54.3,53.5 54.7,53.1 J3.1
NetC31_2: C31.2 J3.2 L4.2 | length 3.8
  Top Layer w0.5: L4.2 53.995,51.5 C31.2 54.505,51.505 54.85,51.85 J3.2
NetC33_1: C33.1 R20.2 R22.1 U5.5 | length 11.8
  Top Layer w0.3: U5.5 57.905,17.695 v1(58.8,16.8)
  Bottom Layer w0.3: v1(58.8,16.8) 63.1,16.8 ; R20.2 R22.1 63.1,16.8 ; C33.1 63.1,16.111 63.1,16.8
NetD1_1: D1.1 D2.1 F1.1
NetD5_2: D5.2 R7.2 | length 2
  Bottom Layer w0.254: R7.2 11.45,13.85 D5.2
NetD6_1: D6.1 Q1.1 R3.1 R4.2 U1.5 | length 10.5
  Top Layer w0.254: v1(14.8,47.8) D6.1 15.455,48.795 R4.2 R3.1 17.389,46.511 17.96,45.94 U1.5
  Bottom Layer w0.254: v1(14.8,47.8) 14.8,48.603 Q1.1
NetD7_2: D7.2 Q2.2 R7.1 R8.1 | length 6.2
  Bottom Layer w0.254: R7.1 9.8,14.3 D7.2 11.9,16.4 R8.1 11.889,17.6 Q2.2
NetD8_1: D8.1 R11.2 | length 1.7
  Top Layer w0.254: D8.1@22.895,17.095 D8.1 ; R11.2@24.395,17.2 R11.2@24.5,17.095
  Top Layer w0.5: D8.1 R11.2@24.395,17.2
NetD9_1: D9.1 R24.1 | length 1.8
  Top Layer w0.254: R24.1 73.6,45.289 D9.1
NetD9_2: D9.2 D10.1 | length 3.4
  Top Layer w0.254: D10.1 71.8,47.4 D9.2
NetD10_2: D10.2 Q3.2 R25.2 | length 4.1
  Top Layer w0.254: R25.2 69.6,50.705 Q3.2 70.8,49.5 71.1,49.2 D10.2
NetD11_2: D11.2 R28.2 | length 2.5
  Top Layer w0.254: R28.2 56.45,26.7 D11.2
NetD12_2: D12.2 R29.2 | length 2.5
  Top Layer w0.254: R29.2 56.45,38.089 D12.2
NetD13_2: D13.2 Q4.2 R28.1 R30.1 | length 5.3
  Top Layer w0.254: Q4.2 D13.2 R28.1
NetD14_2: D14.2 Q5.2 R29.1 R31.1 | length 5.3
  Top Layer w0.254: Q5.2 D14.2 R29.1
NetD15_2: D15.2 R34.2 | length 2.5
  Top Layer w0.254: R34.2 56.45,32.389 D15.2
NetD16_2: D16.2 R35.2 | length 2.5
  Top Layer w0.254: R35.2 56.45,43.789 D16.2
NetD17_2: D17.2 Q6.2 R34.1 R36.1 | length 5.3
  Top Layer w0.254: Q6.2 D17.2 R34.1
NetD18_2: D18.2 Q7.2 R35.1 R37.1 | length 5.3
  Top Layer w0.254: Q7.2 D18.2 R35.1
NetF1_2: Designator39. F1.2 J1.2 | length 2.2
  Bottom Layer w1: Designator39. v2(5.6,8.9)
NetL3_1: L3.1 U4.8 | length 3.4
  Top Layer w0.4: U4.8 48.75,53.25 49,53.5 L3.1
NetL4_1: L4.1 U4.5 | length 3.4
  Top Layer w0.4: U4.5 48.75,51.75 49,51.5 L4.1
NetQ1_2: Q1.2 Q2.1 R6.2 W1.2 | length 42.3
  Top Layer w0.254: v1(16,54.7) W1.2@16,56.6
  Bottom Layer w0.254: Q2.1 9.335,50.235 10.805,51.705 R6.2 Q1.2@14.895,51.705 ; Q1.2@14.8,51.8 Q1.2@14.895,51.705 ; v1(16,54.7) 14.9,53.6 Q1.2 Q1.2@14.895,51.705
NetQ3_1: Q3.1 R23.1 U6.2 | length 6.1
  Top Layer w0.254: U6.2 64.6,46.411 R23.1 67.567,46.4 Q3.1
NetR1_1: R1.1 R2.1 U1.4 | length 4.2
  Top Layer w0.254: U1.4 18.59,54.39 R1.1 R2.1@19.9,54.4
NetR5_2: R5.2 U1.3 | length 2.6
  Top Layer w0.254: U1.3 v1(19.86,53)
  Bottom Layer w0.254: v1(19.86,53) 19.86,54.055 R5.2
NetR9_2: R9.2 U3.44 | length 2.1
  Top Layer w0.254: v1(22.6,30.9) 22.65,30.95 U3.44
  Bottom Layer w0.254: R9.2 v1(22.6,30.9)
NetR10_1: R10.1 U3.20 | length 2.7
  Top Layer w0.254: U3.20 33.939,32.45 R10.1
NetR12_1: R12.1 U3.38 | length 2.1
  Top Layer w0.254: v1(22.6,34) 22.65,33.95 U3.38
  Bottom Layer w0.254: R12.1 21.811,34 v1(22.6,34)
NetR13_1: R13.1 U3.40 | length 2.1
  Top Layer w0.254: v1(22.6,33) 22.65,32.95 U3.40
  Bottom Layer w0.254: R13.1 21.811,33 v1(22.6,33)
NetR17_2: R17.2 U4.1 | length 2.5
  Top Layer w0.254: R17.2 42.8,53.7 43.25,53.25 U4.1
NetR18_2: R18.2 U4.2 | length 2.4
  Top Layer w0.254: R18.2 42.9,52.4 43.25,52.75 U4.2
NetR21_1: R21.1 U5.4 | length 2.6
  Top Layer w0.254: R21.1 48.716,17.695 U5.4
NRST: C22.2 Designator34. J2.4 U3.7 | length 17.5
  Top Layer w0.254: U3.7 28.5,26.1 v1(28.8,25.8) 28.8,25.7 29.4,25.1 34.6,25.1 36.98,22.72 J2.4
  Bottom Layer w0.254: C22.2 28.8,25.305 v1(28.8,25.8) ; J2.4 37,19.78 Designator34.
OUT: Q13.2 R38.1 U3.21 | length 46.9
  Top Layer w0.254: v1(30.7,33.3) 31.05,32.95 U3.21 ; R38.1 63.211,44.089 Q13.2 v1(64.9,43.6)
  Bottom Layer w0.254: v1(30.7,33.3) 33.2,35.8 41.4,35.8 43.5,37.9 43.5,42.1 44.9,43.5 58.2,43.5 59.3,44.6 62.7,44.6 63.7,43.6 v1(64.9,43.6)
OUTPUT: D44.2 J4.7 Q13.1 | length 13.3
  Top Layer w0.5: Q13.1 62.735,36.565 63.7,35.6 J4.7
  Top Layer w1: J4.7 v2(69.4,35.6)
  Bottom Layer w1: v2(69.4,35.6) D44.2
P3V3: C13.2 C17.2 C18.2 C19.2 C20.2 C21.2 Designator37. J2.1 R11.1 R12.2 R13.2 R14.2 R15.2 R23.2 R26.1 R27.1 R32.1 R33.1 U2.5 U3.1 U3.9 U3.24 U3.36 U3.48 U6.5 | length 140.1
  Top Layer w0.254: v1(22.6,29) 22.65,28.95 U3.48 24.95,28.95 v1(25,29) ; v1(25.5,25.9) U3.1 v1(25.5,28.2) ; U3.36 C17.2 ; U3.9 29.5,26.2 v1(29.8,25.9) ; U3.24 34.045,34.45 C19.2 ; 43.8,27.3 43.989,27.111 ; 44.495,23.305 44.6,23.2
  Top Layer w0.5: v2(24.2,38.2) 24.205,38.195 C17.2 ; R11.1 24.5,21.5 24.2,21.8 24.2,27.4 25,28.2 v1(25.5,28.2) ; C19.2 34.995,37.3 ; R14.2 R15.2 44.495,23.305 ; 43.8,32.8 R32.1 ; 43.989,27.111 R26.1 ; 44.1,38.5 R27.1 46.4,39.2 45.1,40.5 45.1,43.6 45.7,44.2 R33.1 49.2,47 61.9,47 ; R23.2 62.5,46.4 61.9,47 ; U6.5 62.6,51 61.9,50.3 61.9,47
  Top Layer w0.7: v2(31.9,37.9) 32.5,37.3 35.3,37.3 36.1,38.1 36.1,39.8 36.5,40.2 42.7,40.2 43.8,39.1 43.8,32.8 43.8,27.3 43.8,25.1 44.6,24.3 44.6,23.2 J2.1
  Bottom Layer w0.254: C18.2 22.305,29 v1(22.6,29) ; C20.2 v1(25.5,25.9)
  Bottom Layer w0.5: C21.2 29.8,25.105 v1(29.8,25.9) ; J2.1 44.7,19.7 Designator37.
  Bottom Layer w0.7: v1(29.8,25.9) 29.8,26.8 29.1,27.5 26.2,27.5 v1(25.5,28.2) 25,28.7 v1(25,29) 25,31.2 24.3,31.9 21.1,31.9 20.7,32.3 20.7,35.7 21.4,36.4 23.3,36.4 24.2,37.3 v2(24.2,38.2) 24.6,38.6 27.1,38.6 28.8,36.9 30.9,36.9 v2(31.9,37.9)
P5V0: C12.2 C15.2 C16.1 C26.2 C27.2 C32.1 L2.2 R2.2 U2.1 U2.3 U4.3 U4.7 U5.3 | length 95.7
  Top Layer w0.254: C32.1 48.746,18.965 U5.3
  Top Layer w0.3: v1(43.3,51.8) 43.75,52.25 U4.3 ; U4.7 47.95,52.75 48.2,52.5 v2(49.1,52.5)
  Top Layer w0.35: U2.3 34.8,46.7
  Top Layer w0.6: U5.3 53.765,18.965 v1(53.8,19)
  Top Layer w0.8: 28.1,55.4 29.4,56.7 35.1,56.7 36.7,55.1 41,55.1 41.8,55.9 v1(43.8,55.9) ; v1@43.9,55.9 v2(48.1,55.9)
  Bottom Layer w0.5: v1(28.1,52.5) C15.2 ; v1(43.3,51.8) 43.3,55.4 v1(43.8,55.9)
  Bottom Layer w0.8: v2(48.1,55.9) 49.1,54.9 v2(49.1,52.5) 49.1,49.8 51.8,47.1 65.6,47.1 67.8,44.9 67.8,40 53.8,26 v1(53.8,19)
PULSE: J4.8 R24.2 | length 10.5
  Top Layer w0.254: J4.8 66.4,41.3 68.7,43.6 70.895,43.6 R24.2
PWM-AUDIO: R16.1 U3.30 | length 2
  Top Layer w0.254: U3.30 R16.1
SPEED-PULSE: U3.10 U6.4 | length 68.5
  Top Layer w0.254: v1(29.5,34.3) 29.5,30.4 30,29.9 U3.10 ; U6.4 v1(65.6,52.1)
  Bottom Layer w0.254: v1(29.5,34.3) 34.9,39.7 38.6,39.7 40.2,41.3 40.2,49.3 41.746,50.846 41.746,56.746 44.1,59.1 60,59.1 61.3,57.8 61.3,53.3 62.5,52.1 v1(65.6,52.1)
SWCLK: Designator35. J2.3 R14.1 U3.37 | length 26.6
  Top Layer w0.254: U3.37 25.05,34.45 v1(25.1,34.4) ; v1(38.3,22.3) 39.489,22.3 R14.1 39.52,22.269 J2.3
  Bottom Layer w0.254: v1(25.1,34.4) 25.7,33.8 25.7,32.4 35.8,22.3 v1(38.3,22.3) ; Designator35. 39.5,19.78 J2.3
SWDIO: Designator36. J2.2 R15.1 U3.34 | length 28.6
  Top Layer w0.254: v1(26.5,34.3) U3.34 ; v1(41.1,22.3) 42.089,22.3 R15.1 42.1,19.84 J2.2
  Bottom Layer w0.254: v1(26.5,34.3) 26.5,32.5 35.9,23.1 40.3,23.1 v1(41.1,22.3) ; J2.2 42.1,19.76 Designator36.
VBAT: C3.1 C4.1 C5.1 C6.1 D1.2 D2.2 D3.2 L1.1
VIN: C1.1 C2.1 C7.1 C8.1 C9.1 C10.1 L1.2 R3.2 R6.1 U1.7 | length 5.8
  Bottom Layer w0.254: v1(13.3,44.9) R6.1
XIN: C24.1 U3.5 Y1.3 | length 8.6
  Top Layer w0.254: C24.1 26.689,21.089 Y1.3 27.9,22.3 27.9,23.9 27.5,24.3 U3.5
XOUT: C23.1 U3.6 Y1.1 | length 6.5
  Top Layer w0.254: U3.6 28,24.9 29,23.9 Y1.1 30.889,23 C23.1
pads on no net: Designator43. Designator44. Designator45. Designator46. Designator47. Designator48. U1.2 U3.2 U3.3 U3.4 U3.11 U3.12 U3.13 U3.14 U3.15 U3.25 U3.26 U3.27 U3.28 U3.29 U3.31 U3.39 U3.41 U3.42 U3.43 U3.45 U6.1

## Polygon pours and split planes (outlines as drawn)
NetD1_1 on Top Layer "Top Layer-No Net 1" (solid, remove dead copper, pour order 27): 1.6,13.3 2.4,13.3 3.1,13.3 3.4,13.6 3.4,17.4 3.9,17.9 4.4,17.9 8.5,17.9 11,17.9 11.3,18.2 11.3,22.2 10.9,22.6 1,22.6 0.5,22.1 0.5,17.2 0.5,13.6 0.8,13.3
NetF1_2 on Top Layer "Top Layer-No Net 1" (solid, remove dead copper, pour order 25): 6.4,10.6 10.9,10.6 11.1,10.4 11.1,8.6 10.9,8.4 5.2,8.4 4.4,9.2 4,9.6 4,11.4 4,13 4,17.2 4.2,17.4 6.9,17.4 7.1,17.2 7.1,13.9 5.9,12.7 5.9,11.1
GND on Top Layer "Top Layer-No Net 1" (solid, remove dead copper, pour order 42): 35.1,18.7 35.6,18.7 36.1,18.2 45.6,18.2 46.1,18.7 46.2,18.8 46.2,20.2 46.2,20.7 45.8,21.1 45.6,21.3 45.6,22 45.6,24.7 44.9,25.4 44.8,25.5 44.8,26.5 44.8,37.1 45.3,37.6 46.9,37.6 47.4,38.1 47.4,39.2 47.4,39.4 46.8,40 46,40.8 46,41.8 46,42.5 47.5,44 49.7,46.2 50.6,46.2 59.9,46.2 61.5,46.2 62.3,47 62.4,47.1 62.4,48.4 62.4,49.2 63.2,50 64.4,50 65.7,50 66.3,50.6 66.5,50.8 66.5,53 76,53 76,0 58,0 58,15 35.1,15
GND on Top Layer "Top Layer-No Net 1" (solid, remove dead copper, pour order 40): 45.2,53.8 46.2,53.8 46.4,53.8 46.6,53.8 46.7,53.7 46.7,49.1 44.3,49.1 44.7,49.5 44.7,50.2 44.7,50.9 45,51.2 45.1,51.3 45.1,53.7 45.2,53.8
GND on Top Layer "Top Layer-No Net 1" (solid, remove dead copper, pour order 38): 31,55.7 31.5,55.7 33.3,55.7 34.7,55.7 36.3,54.1 36.3,53.3 36.7,52.9 36.8,52.9 38.5,52.9 38.9,52.9 39.1,52.7 39.1,51.8 41.1,49.8 41.6,49.3 43.2,49.3 44.4,49.3 44.9,49.3 46.1,50.5 53.1,50.5 53.1,47.9 49.8,47.9 48.8,47.9 48.4,47.5 46.1,45.2 43.2,45.2 40.8,45.2 38.4,45.2 38.1,45.5 38.1,48.7 37.5,49.3 33.9,49.3 33.4,49.8 29.5,53.7 29.5,55 29.5,55.3 29.9,55.7
GND on Top Layer "Top Layer-No Net 1" (solid, remove dead copper, pour order 36): 14.6,59.5 19.9,59.5 43.2,59.5 61.8,59.5 62.5,58.8 62.5,52.6 61.2,51.3 61,51.1 61,49.3 61,48.4 60.5,47.9 52.5,47.9 52.5,49.3 52.5,50.5 56.7,50.5 57.1,50.9 57.1,54 56.6,54.5 51.4,54.5 49.5,56.4 49,56.9 45.7,56.9 40.8,56.9 40,57.7 39.1,57.7 28.9,57.7 28.4,57.2 28,56.8 27.1,56.8 20.9,56.8 19.5,55.4 17.7,55.4 17.3,55.8 17.2,55.9 17.2,57.8 17,58 15.8,58 15.4,57.6 14.6,57.6
GND on Top Layer "Top Layer-No Net 1" (solid, remove dead copper, pour order 34): 21.8,15 35.6,15 35.6,18.3 35.6,21.1 34.6,22.1 29.7,22.1 29.5,21.9 28.6,21.9 28.4,21.9 28.1,21.6 28.1,20.9 28.1,20.7 27.7,20.3 27.7,18.9 27.3,18.5 27.1,18.5 26,18.5 25.6,18.1 25.6,16.8 25.1,16.3 21.8,16.3
GND on Top Layer "Top Layer-No Net 1" (solid, remove dead copper, pour order 22): 25.8,36.8 26.2,36.8 26.2,34.8 26,34.6 26,34.2 26,34 26.4,33.6 27.8,33.6 28.6,33.6 29,33.2 29,30.2 29.5,29.7 29.5,28.8 29.5,28.4 29.3,28.2 28,28.2 27.1,28.2 26.8,28.2 26.1,28.9 25.5,29.5 25.2,29.5 24.8,29.5 24.6,29.3 23.8,29.3 23.8,29.6 24.3,29.6 24.5,29.6 24.6,29.7 24.7,29.8 24.7,33 25.6,33.9 25.7,34 25.7,34.8 25.7,35.3 25.8,35.4
GND on Top Layer "Top Layer-No Net 1" (solid, remove dead copper, pour order 20): 37.3,38.9 39.2,38.9 39.5,39.2 39.6,39.3 40.2,39.3 41,39.3 42.3,39.3 42.8,38.8 42.8,37.8 42.8,35.5 42.8,33.1 42.8,24.9 42.2,24.3 36.6,24.3 35.3,25.6 35.1,25.8 34.3,25.8 34,25.8 33,26.8 33,34.9 37,38.9
GND on Top Layer "Top Layer-No Net 1" (solid, remove dead copper, pour order 18): 23.4,40.2 33,40.2 33.6,39.6 35.2,39.6 35.3,39.5 35.3,39.4 35.3,38.3 35,38 34,38 33,38 32.4,38.6 31.7,38.6 31.5,38.6 31.3,38.4 31.2,38.3 31.2,38 31.2,37.4 31,37.2 25,37.2 24.8,37 24.8,36.4 24.8,35.5 24.5,35.2 23.8,35.2 21.7,35.2 21.7,40.2
GND on Top Layer "Top Layer-No Net 1" (solid, remove dead copper, pour order 14): 1.1,6.2 4.1,6.2 5.4,7.5 5.6,7.7 5.8,7.7 7.3,7.7 11.3,7.7 12,8.4 12,16.7 12,18.1 12,22.3 12.3,22.6 18.2,22.6 19,23.4 19,24.7 19,28 18,29 17.6,29.4 17.6,30.4 17.6,35.7 17.6,39.2 18.4,40 18.6,40.2 20.3,40.2 23.4,40.2 23.4,37.9 23.4,37.8 23.4,36.5 22,35.1 21.8,34.9 21.8,33.1 21.8,31.8 20.8,30.8 20.5,30.5 20.5,29.1 20.5,28.3 21.3,27.5 22.2,26.6 22.2,25.3 22.2,15.4 21.8,15 18,15 18,0 0,0 0,5.4 0.8,6.2
GND on Top Layer "Top Layer-No Net 1" (solid, pour order 12): 2.2,26.6 1.1,26.6 0.6,26.6 0.2,27 0,27.2 0,53 13,53 13,60 15.2,60 15.2,54.5 15.6,54.1 17.6,54.1 17.9,53.8 17.9,53.5 17.9,52.6 17.9,50.4 18.2,50.1 18.9,50.1 22.2,50.1 22.3,50 22.3,47.5 22.2,47.4 17.8,47.4 17.6,47.6 17.3,47.9 17.3,48.2 17.3,49.2 17,49.5 16.1,49.5 15.8,49.8 15.8,50.3 15.6,50.5 14,50.5 13.7,50.2 13.7,46.4 13.4,46.1 11.1,46.1 10.4,45.4 10.2,45.2 10.2,44.8 10.2,39.7 10.2,37.3 9.8,36.9 4.1,36.9 3.6,36.4 3.6,36.3 3.6,30.1 2.7,29.2 2.4,28.9 2.4,27.2 2.4,26.8
VBAT on Top Layer "Top Layer-No Net 1" (solid, remove dead copper, pour order 17): 2.2,23.3 17.1,23.3 18,23.3 18.3,23.6 18.3,27.6 18,27.9 10.9,27.9 10.1,28.7 10.1,36 9.8,36.3 4.5,36.3 4.2,36 4.2,29.7 3.1,28.6 3.1,26.6 2.7,26.2 0.9,26.2 0.6,25.9 0.5,25.8 0.5,25.3 0.5,23.7 0.9,23.3
VIN on Top Layer "Top Layer-No Net 1" (solid, remove dead copper, pour order 19): 15.5,28.6 11.3,28.6 10.8,29.1 10.8,45 11.3,45.5 11.4,45.6 16.6,45.6 17.5,44.7 17.9,44.3 20.2,44.3 20.7,44.8 20.7,47 20.8,47.1 21.2,47.1 21.4,47.1 21.5,47.1 21.6,47 21.6,44.8 21.9,44.5 23.2,43.2 23.2,41.7 23.2,41.2 22.9,40.9 20.8,40.9 18.3,40.9 16.8,39.4 16.8,31.1 16.8,29.1 16.3,28.6
NetC11_1 on Top Layer "Top Layer-No Net 1" (solid, remove dead copper, pour order 27): 22.3,47.1 22.8,47.1 23.6,47.1 25.2,45.5 32.3,45.5 32.6,45.2 32.6,41.2 32.3,40.9 32.2,40.9 24.2,40.9 23.9,41.2 23.9,43 23,43.9 22,44.9 22,45.1 22,47 22.1,47.1
P5V0 on Top Layer "Top Layer-No Net 1" (solid, remove dead copper, pour order 29): 28.7,46.4 27.5,46.4 25.3,46.4 24.7,47 24.7,51.3 23.6,52.4 23.2,52.8 23.2,56.2 28.6,56.2 28.9,55.9 28.9,53.5 30.9,51.5 32.6,49.8 32.6,46.8 32.6,46.7 32.3,46.4
P5V0 on Top Layer "Top Layer-No Net 1" (solid, remove dead copper, pour order 31): 23.5,56.2 21,56.2 20.8,56 20.8,53.8 21,53.6 22.1,53.6 22.4,53.6 23.5,52.5
P5V0 on Top Layer "Top Layer-No Net 1" (solid, remove dead copper, pour order 33): 32.6,49.8 33.7,48.7 37.3,48.7 37.6,48.4 37.6,44.5 37.4,44.3 36.7,44.3 36.5,44.5 36.5,44.9 36.5,46.1 36.2,46.4 32.3,46.4 32.3,49.8
P3V3 on Top Layer "Top Layer-No Net 1" (solid, remove dead copper, pour order 35): 36.8,42.9 38.1,42.9 38.8,42.9 39,42.7 39,39.7 38.8,39.5 36,39.5 35.8,39.7 35.8,42.7 36,42.9
GND on Bottom Layer "Top Layer-No Net 1" (solid, remove dead copper, pour order 16): 0,0 18,0 18,15 58,15 58,0 76,0 76,53 63,53 63,60 13,60 13,53 0,53
NetC11_1 on Bottom Layer "Top Layer-No Net 1" (solid, remove dead copper, pour order 23): 23.5,46.3 27.2,46.3 27.4,46.1 27.4,43.6 27.2,43.4 23.5,43.4 23.3,43.6 23.3,46.1

## Keep-outs
Keep-Out Layer:
  lines w0.254: 0,0 0,9.6 2,9.6 ccw(c2,11) 2,12.4 0,12.4 0,53 13,53 13,60 36.6,60 36.6,58 ccw(c38,58) 39.4,58 39.4,60 63,60 63,53 76,53 76,12.4 74,12.4 ccw(c74,11) 74,9.6 76,9.6 76,0 58,0 58,15 18,15 18,0 0,0

## Silkscreen, mask and mechanical layers (free items; w line width, h text height)
Top Overlay:
  text "GND" at 33.5,16.9 h0.7
  text "RST" at 36.1,16.9 h0.7
  text "CLK" at 38.6,16.9 h0.7
  text "DIO" at 41.2,16.9 h0.7
  text "V+" at 44.1,16.9 h0.7
  text "DCETDC23-REV.2" at 59.5,6.1 h1